# Altium PCB car2.PcbDoc
Units mm, origin at the board's own origin, x right, y up, seen from the top; angles counter-clockwise.
Board outline 99.57 x 90.42 mm, 2 copper layers (Top Layer, Bottom Layer); 59 components, 55 nets, 230 pads, 60 vias.
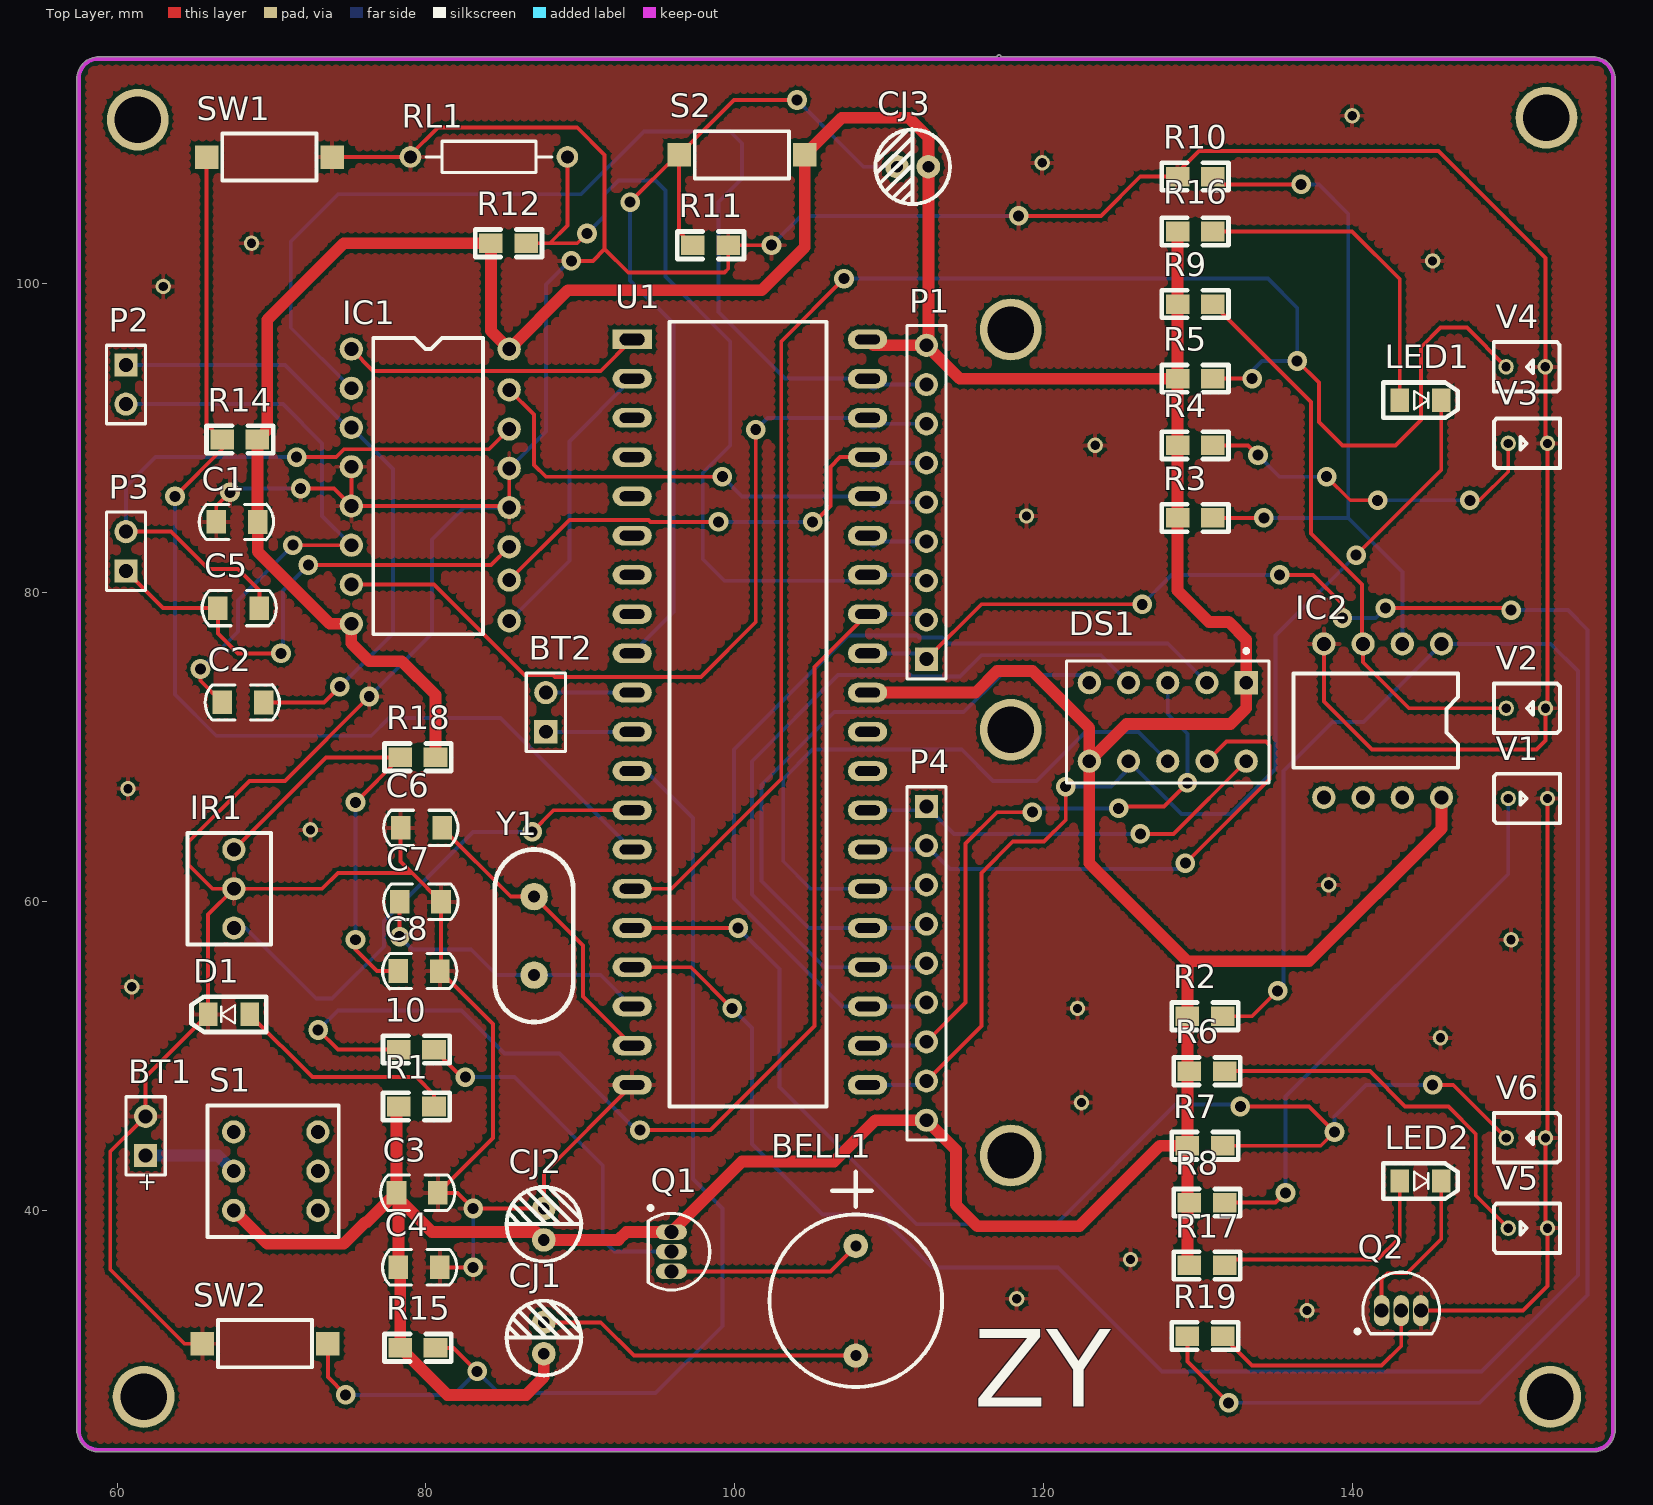
[diagram p0: Top Layer view]
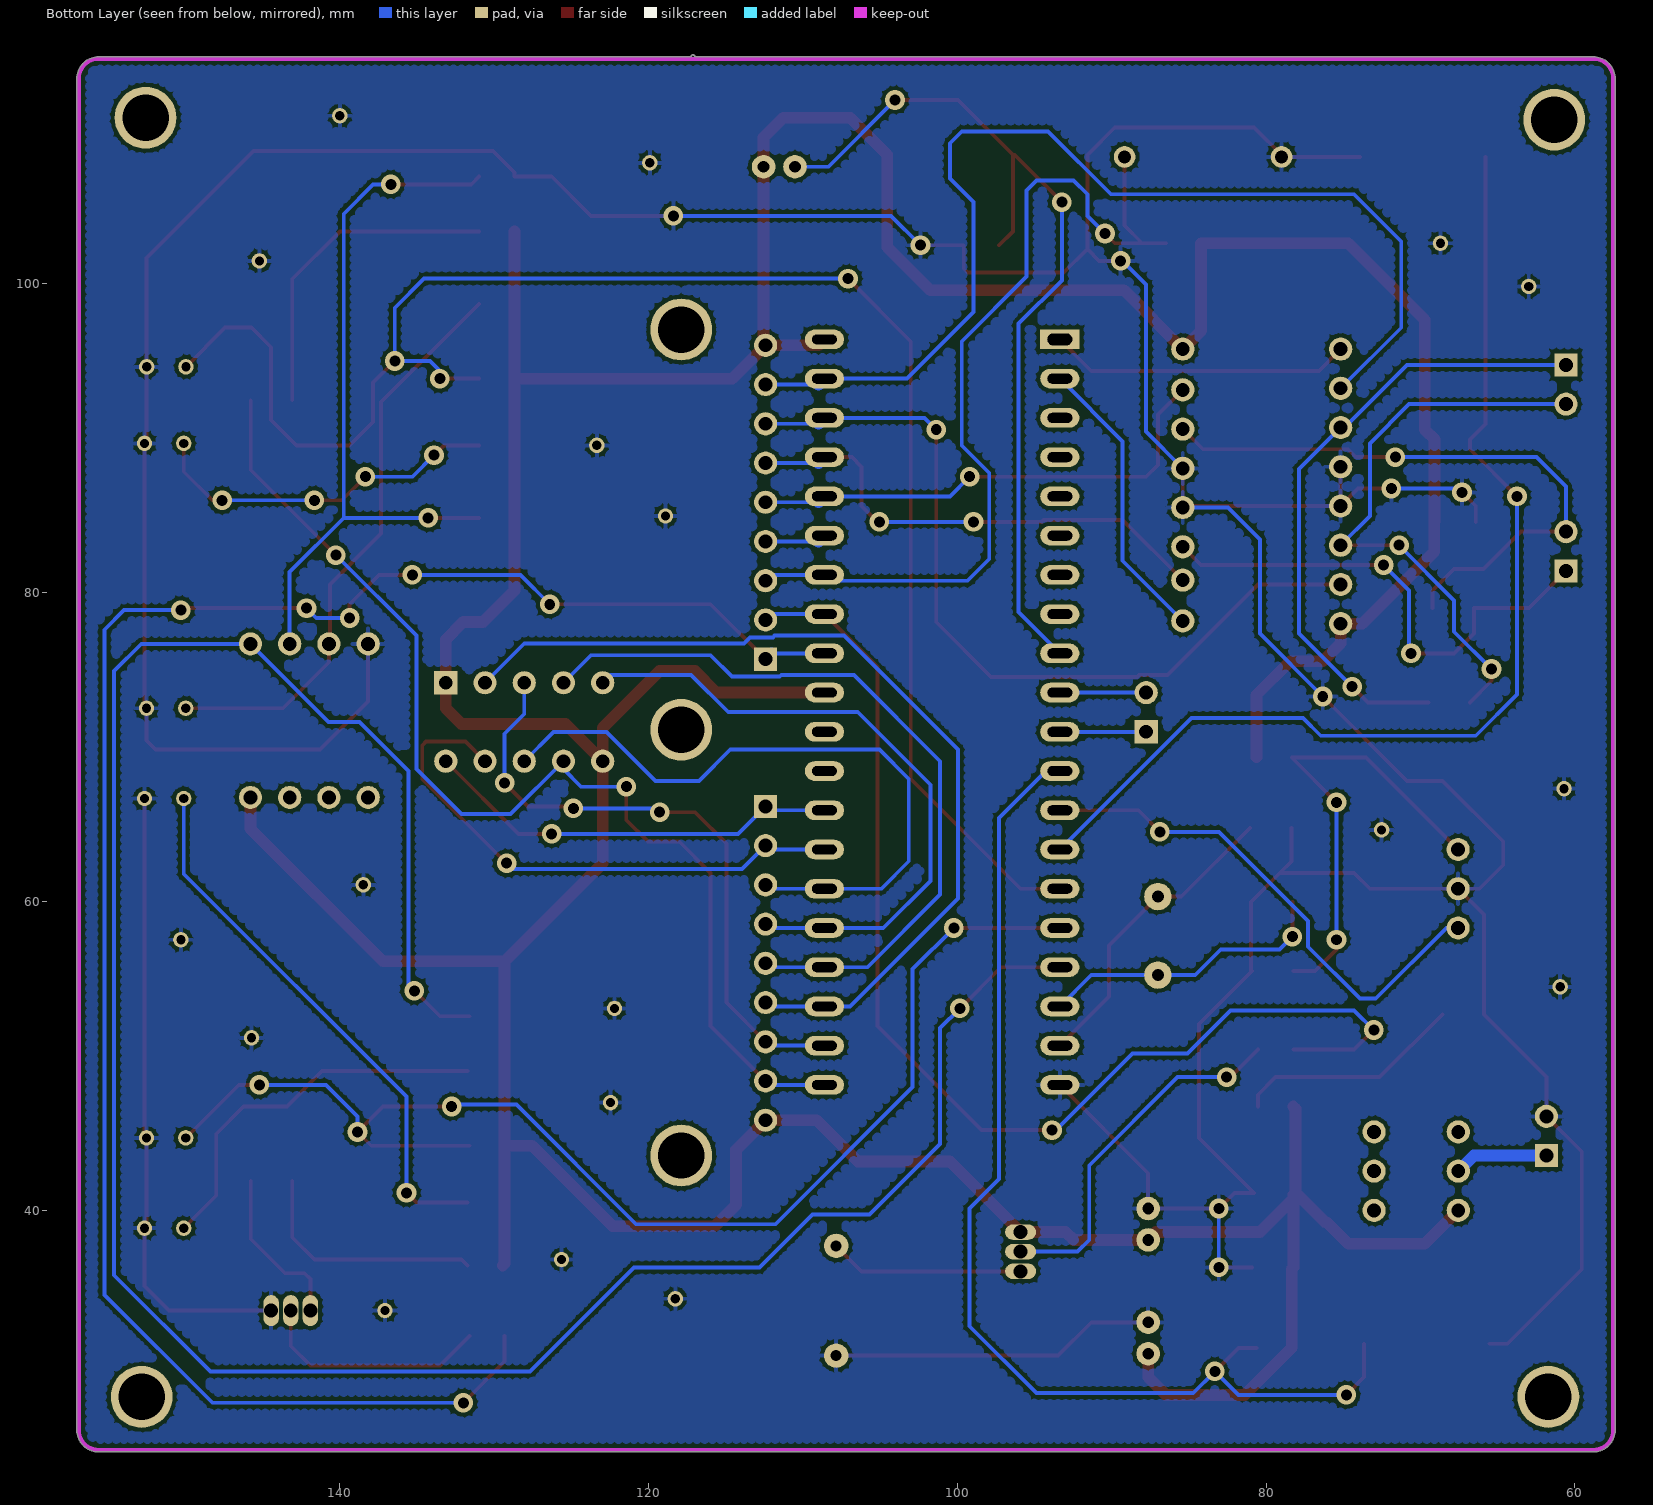
[diagram p1: Bottom Layer view, seen from below]

## Layer stack, top to bottom
Top Layer: signal copper 0.0356
Dielectric: dielectric 0.32, FR-4, Dk 4.8
Bottom Layer: signal copper 0.0356

## Board outline
57.404,25.781 ccw(c58.801,25.781) 58.801,24.384 155.575,24.384 ccw(c155.575,25.781) 156.972,25.781 156.972,113.284 ccw(c155.575,113.284) 155.575,114.681 117.221,114.681 ccw(c117.094,114.681) 116.967,114.681 58.801,114.681 ccw(c58.801,113.284) 57.404,113.284

## Design rules (kind name [scope] priority, off if disabled: settings)
Clearance [All] p1: gap=0.254
PolygonConnect [All] p1: connectstyle=Relief reliefconductorwidth=0.254 reliefentries=4 polygonreliefangle="90 Angle" airgapwidth=0.254
RoutingVias [All] p1: holewidth=0.711 width=1.27 viastyle="Through Hole" minholewidth=0.711 minwidth=1.27 maxholewidth=0.711 maxwidth=1.27
SolderMaskExpansion [All] p1: expansion=0.102
Width [InNet('VCC')] p1: maxlimit=0.762 minlimit=0.762 preferedwidth=0.762
Width Width_1 [All] p2: maxlimit=0.762 minlimit=0.254 preferedwidth=0.254 toplayer_maxwidth=0.254 minimp=50.000000 maximp=50.000000 favimp=50.000000
28 further rules are at their usual default settings.

## Components (designator, comment, footprint, x,y, rotation, side; value= is the part's Value field where it differs from the comment)
10 "Res2" 0805 80.518,50.419 r180 top (schematic designator R13)
BELL1 "BELL" BELL 107.823,37.719 r90 top
BT1 "Battery" BAT-2 61.849,44.831 r90 top
BT2 "Header 2" HDR1X2 87.757,70.993 r90 top
C1 "Cap" 0805C 66.421,84.582 r0 top
C2 "Cap" 0805C 66.802,72.898 r0 top
C3 "Cap" 0805C 80.772,41.148 r180 top
C4 "Cap" 0805C 80.899,36.322 r180 top
C5 "Cap" 0805C 69.215,78.994 r180 top
C6 "Cap" 0805C 78.359,64.777 r0 top
C7 "Cap" 0805C 80.974,59.983 r180 top
C8 "Cap" 0805C 80.899,55.499 r180 top
CJ1 "" RB10U 87.63,31.75 r90 top
CJ2 "" RB10U 87.63,39.116 r90 top
CJ3 "" RB10U 111.506,107.569 r180 top
D1 "LED0" 0805-LED 68.58,52.705 r0 top
DS1 "Dpy Amber-CA" A 128.016,71.628 r270 top
IC1 "L293D" L293D 80.137,87.249 r0 top
IC2 "LM393" LM393 141.478,71.712 r270 top
IR1 "红外1838" 红外1838 67.564,60.833 r90 top
LED1 "LED" 0805-LED 143.033,92.456 r180 top
LED2 "LED" 0805-LED 143.033,41.91 r180 top
P1 "Header 9" HDR1X9 112.395,75.692 r90 top
P2 "Header 2" HDR1X2 60.579,94.742 r270 top
P3 "Header 2" HDR1X2 60.579,81.407 r90 top
P4 "Header 9" HDR1X9 112.395,66.167 r270 top
Q1 "2N3906" TO-92A 95.885,37.338 r180 top
Q2 "2N3906" TO-92A 143.129,33.528 r270 top
R1 "Res2" 0805 78.232,46.736 r0 top
R2 "Res2" 0805 131.572,52.578 r180 top
R3 "Res2" 0805 130.937,84.836 r180 top
R4 "Res2" 0805 128.651,89.535 r0 top
R5 "Res2" 0805 128.651,93.853 r0 top
R6 "Res2" 0805 129.413,49.022 r0 top
R7 "Res2" 0805 129.286,44.196 r0 top
R8 "Res2" 0805 129.413,40.513 r0 top
R9 "Res2" 0805 128.651,98.679 r0 top
R10 "Res2" 0805 128.651,106.934 r0 top
R11 "Res2" 0805 99.568,102.489 r180 top
R12 "Res2" 0805 84.201,102.616 r0 top
R14 "Res2" 0805 69.088,89.916 r180 top
R15 "Res2" 0805 78.33,31.115 r0 top
R16 "Res2" 0805 128.651,103.378 r0 top
R17 "Res2" 0805 129.413,36.449 r0 top
R18 "Res2" 0805 78.33,69.342 r0 top
R19 "Res2" 0805 131.572,31.877 r180 top
RL1 "Res2" AXIAL-0.4 84.074,108.204 r0 top
S1 "自锁开关" 自锁开关 70.104,42.545 r0 top
S2 "" SWD 96.393,108.331 r0 top
SW1 "SW" SWD 73.914,108.204 r180 top
SW2 "SW" SWD 65.532,31.369 r0 top
U1 "AT89C51" 89c52 101.473,72.898 r0 top
V1 "红外管" 红外管 151.257,66.675 r0 top
V2 "红外管" 红外管 151.267,72.517 r180 top
V3 "红外管" 红外管 151.257,89.662 r0 top
V4 "红外管" 红外管 151.257,94.615 r180 top
V5 "红外管" 红外管 151.257,38.862 r0 top
V6 "红外管" 红外管 151.267,44.704 r180 top
Y1 "11.0592MHZ" XTAL 86.995,57.785 r90 top

## Footprints (in the part's own frame and the unit in brackets; to place one, negate y for a bottom-side part, rotate by r counter-clockwise, add the part's x,y. Pads: shape width x height; smd on the part's side, far side on the other; paste and mask are expansions set on the pad)
89c52 [mil]
  rect 100x50 hole 30 slot 62.99 at 0 deg: 1(-320,925)
  oval 100x50 hole 25 slot 62.99 at 0 deg: 2(-320,825) 3(-320,725) 4(-320,625) 5(-320,525) 6(-320,425) 7(-320,325) 8(-320,225) 9(-320,125) 10(-320,25) 11(-320,-75) 12(-320,-175) 13(-320,-275) 14(-320,-375) 15(-320,-475) 16(-320,-575) 17(-320,-675) 18(-320,-775) 19(-320,-875) 20(-320,-975) 21(280,-975) 22(280,-875) 23(280,-775) 24(280,-675) 25(280,-575) 26(280,-475) 27(280,-375) 28(280,-275) 29(280,-175) 30(280,-75) 31(280,25) 32(280,125) 33(280,225) 34(280,325) 35(280,425) 36(280,525) 37(280,625) 38(280,725) 39(280,825) 40(280,925)
  silkscreen extent -225,-1030 175,970
0805 [mil]
  rect 60x50 smd: 1(0,0) 2(90,0)
  silkscreen extent -40,-35 130,35
0805-LED [mm]
  rect 1.2x1.5 smd: 1(0,0) 2(-2.686,0)
  silkscreen extent -3.76,-1.14 1.07,1.14
0805C [mil]
  rect 50x60 smd: 1(0,0) 2(105.71,-0.32)
  silkscreen extent -43,-45 146,45
A [mm] "LED, 7-Segment Display, 7.62 mm, RHD; 10 Leads; Row Space 5.08 mm; Pitch 2.54 mm"
  rect 1.5x1.5 hole 0.9: 1(-2.54,5.08)
  round 1.5 hole 0.9: 2(-2.54,2.54) 3(-2.54,0) 4(-2.54,-2.54) 5(-2.54,-5.08) 6(2.54,-5.08) 7(2.54,-2.54) 8(2.54,0) 9(2.54,2.54) 10(2.54,5.08)
  silkscreen extent -4.72,-6.55 3.95,6.55, body extent -3.95,-6.55 3.95,6.55, height 6.34
AXIAL-0.4 [mm] "Axial Device, Thru-Hole; 2 Leads; 0.4 in Pin Spacing"
  round 1.4 hole 0.85: 1(-5.08,0) 2(5.08,0)
  silkscreen extent -4.06,-1.02 4.06,1.02
BAT-2 [mm] "Battery; 2 Leads"
  rect 1.5x1.5 hole 0.9: 1(-1.27,0)
  round 1.5 hole 0.9: 2(1.27,0)
  silkscreen extent -2.54,-1.27 2.54,1.27
BELL [mil]
  round 62 hole 28: 1(0,0) 2(-280,0)
  silkscreen extent -360,-220 188,220
HDR1X2 [mm] "Connector; Header; 2 Position"
  rect 1.5x1.5 hole 0.9: 1(0,0)
  round 1.5 hole 0.9: 2(2.54,0)
  silkscreen extent -1.27,-1.27 3.81,1.27
HDR1X9 [mm] "Connector; Header; 9 Position"
  rect 1.5x1.5 hole 0.9: 1(0,0)
  round 1.5 hole 0.9: 2(2.54,0) 3(5.08,0) 4(7.62,0) 5(10.16,0) 6(12.7,0) 7(15.24,0) 8(17.78,0) 9(20.32,0)
  silkscreen extent -1.27,-1.27 21.59,1.27
L293D [mm]
  round 1.5 hole 0.9: 1(-4.97,8.52) 2(-4.97,5.98) 3(-4.97,3.44) 4(-4.97,0.9) 5(-4.97,-1.64) 6(-4.97,-4.18) 7(-4.97,-6.72) 8(-4.97,-9.26) 9(5.25,-9.08) 10(5.25,-6.44) 11(5.25,-4.28) 12(5.25,-1.74) 13(5.25,0.8) 14(5.25,3.34) 15(5.25,5.88) 16(5.25,8.52)
  silkscreen extent -3.55,-9.94 3.55,9.23
LM393 [mm]
  round 1.5 hole 0.9: 1(-4.97,4.26) 2(-4.97,1.72) 3(-4.97,-0.82) 4(-4.97,-3.36) 5(4.97,-3.36) 6(4.97,-0.82) 7(4.97,1.72) 8(4.97,4.26)
  silkscreen extent -3.05,-5.33 3.05,5.33
RB10U [mil]
  round 60 hole 30: 1(-40,0) 2(40,0)
  silkscreen extent -95,-96 95,95
SWD [mil]
  rect 60x60 smd: 1(-0.4,0.5) 2(319.6,0.5)
  silkscreen extent 40,-60 280,61
TO-92A [mm] "TO, Flat Index; 3 In-Line, Axial Leads; Body Dia. 4.5mm; Leads 0.51 x 0.48 mm (max)"
  oval 2x1 hole 0.9: 1(0,-1.27) 2(0,0) 3(0,1.27)
  silkscreen extent -2.48,-2.95 1.5,2.48, body extent -2.5,-2.5 1.5,2.5, height 6.86
XTAL [mil]
  round 70 hole 30: 1(-100,0) 2(100,0)
  silkscreen extent -220,-100 220,100
红外1838 [mm]
  round 1.5 hole 0.9: 1(-2.54,0) 2(0,0) 3(2.54,0)
  silkscreen extent -3.6,-2.4 3.6,3
红外管 [mm]
  round 1 hole 0.6: 1(-1.2,0) 2(1.34,0)
  silkscreen extent -2.13,-1.6 2.14,1.6
自锁开关 [mm]
  round 1.5 hole 0.9: 1(-2.55,2.55) 2(2.9,2.55) 3(-2.55,0.01) 4(2.9,0.01) 5(-2.55,-2.53) 6(2.9,-2.53)
  silkscreen extent -4.25,-4.25 4.25,4.25

## Part data
10 R1 R2 R3 R4 R5 R6 R7 R8 R9 R10 R11 R12 R14 R15 R16 R17 R18 R19 RL1: "Resistor"
BT1: "Multicell Battery"
BT2 P2 P3: "Header, 2-Pin"
C1 C2 C3 C4 C5 C6 C7 C8: "Capacitor"
CJ1 CJ2 CJ3: library part "Cap Pol1", "Polarized Capacitor (Radial)"
D1: "Typical INFRARED GaAs LED"
DS1: "7.62 mm Black Surface Orange 7-Segment Display: CA, RH DP"
P1 P4: "Header, 9-Pin"
Q1 Q2: "PNP General Purpose Amplifier"
S2: library part SW-PB, "Switch"
V1 V2 V3 V4 V5 V6: library part LED
Y1: library part XTAL, "Crystal Oscillator"

## Free pads (board coordinates)
  round 4 hole 3: D(61.341,110.617) D(61.722,27.94) D(117.856,43.561) D(117.856,71.12) D(117.856,97.028) D(152.527,110.744) D(152.781,27.94)
  round 1 hole 0.6: GND(60.706,67.31) GND(60.96,54.483) GND(62.992,99.822) GND(68.707,102.616) GND(72.517,64.643) GND(118.237,34.29) GND(118.872,84.963) GND(119.888,107.823) GND(122.174,53.086) GND(122.428,46.99) GND(123.317,89.535) GND(125.603,36.83) GND(137.033,33.528) GND(138.43,61.087) GND(139.954,110.871) GND(145.161,101.473) GND(145.669,51.181) GND(150.241,57.531)

## Via types
v1: diameter 1.27, hole 0.711, Top Layer to Bottom Layer, 60 vias

## Nets (pads, with @x,y where several pads share a name; then routed paths per layer and width w, separated by ;. In a path a pad name is that pad's centre, name@x,y a point inside that pad or via, vN(x,y) a via of type N, cw(c..) or ccw(c..) an arc to the next point about the centre after c; other vN are vias at no path point)
GND: BELL1.2 BT1.2 C1.1 C3.1 C4.1 C6.1 C7.1 C8.1 CJ1.2 CJ2.2 D1.2 IC1.4 IC1.5 IC1.12 IC1.13 IC2.4 IR1.2 pad.GND Q2.3 R10.1 R11.1 RL1.1 SW1.1 SW2.1 U1.20 V1.2 V2.1 V3.2 V4.1 V5.2 V6.1 | length 387.7
  Top Layer w0.254: SW2.1 64.376,31.382 59.563,36.195 59.563,43.815 BT1.2 61.849,48.66 D1.2 65.894,59.163 IR1.2 ; C1.1 66.421,85.598 v1(67.31,86.487) ; v1(71.882,86.741) 74.035,86.741 IC1.5 ; SW1.1 78.981,108.191 78.981,108.318 80.772,110.109 89.789,110.109 91.567,108.331 91.567,102.235 ; IC1.4 IC1.5 ; v1(76.327,73.279) 70.866,67.818 68.58,67.818 64.643,63.881 64.643,62.357 66.167,60.833 IR1.2 ; C6.1 78.359,62.598 79.108,61.849 ; C4.1 v1(83.058,36.322) ; IC1.13 IC1.12 85.287,85.609 IC1.5 ; CJ1.2 91.313,32.766 93.472,30.607 BELL1.2 ; v1(89.408,101.473) 90.805,101.473 91.567,102.235 ; U1.20 87.63,42.418 CJ2.2 v1(83.058,40.132) 82.042,41.148 C3.1 84.328,44.704 84.328,52.07 C8.1 80.974,55.574 C7.1 79.108,61.849 ; v1(102.362,102.489) R11.1 99.568,100.965 99.314,100.711 93.091,100.711 91.567,102.235 ; v1(118.364,104.394) 123.698,104.394 126.238,106.934 R10.1 128.651,107.188 130.048,108.585 145.542,108.585 152.457,101.67 V4.1 152.457,89.802 V3.2 V2.1@152.597,72.517 ; IC2.4 138.118,72.956 141.224,69.85 151.892,69.85 152.467,70.425 V2.1 ; Q2.3 151.003,33.528 152.597,35.122 V5.2 152.467,38.992 V6.1 152.597,44.834 V1.2 ; IR1.2 73.279,60.833 74.295,61.849 79.108,61.849
  Bottom Layer w0.254: v1(67.31,86.487) 67.564,86.741 v1(71.882,86.741) ; v1(76.327,73.279) 80.391,77.343 80.391,83.439 82.461,85.509 IC1.12 ; v1(83.058,36.322) v1(83.058,40.132) ; IC1.13 87.757,90.419 87.757,99.949 89.281,101.473 v1(89.408,101.473) ; v1(102.362,102.489) 104.267,104.394 v1(118.364,104.394)
NetBELL1_1: BELL1.1 Q1.3 | length 12.6
  Top Layer w0.254: Q1.3 106.172,36.068 BELL1.1
NetBT1_1: BT1.1 S1.3 | length 6.1
  Bottom Layer w0.762: BT1.1 66.548,43.561 S1.3
NetC2_1: C2.1 IC1.6 P2.2 | length 38.1
  Top Layer w0.254: v1(65.405,75.057) 65.405,74.295 C2.1 ; v1(71.385,83.069) IC1.6
  Bottom Layer w0.254: P2.2 70.739,92.202 73.279,89.662 73.279,84.957 IC1.6 ; v1(65.405,75.057) 67.818,77.47 67.818,79.502 v1(71.385,83.069)
NetC2_2: C2.2 IC1.3 P2.1 | length 40.9
  Top Layer w0.254: C2.2 73.398,72.89 v1(74.422,73.914)
  Bottom Layer w0.254: P2.1 70.866,94.742 74.919,90.689 IC1.3 77.851,88.005 77.851,77.343 v1(74.422,73.914)
NetC5_1: C5.1 IC1.14 P3.2 | length 40.6
  Top Layer w0.254: P3.2 63.5,83.947 65.913,81.534 67.818,81.534 69.215,80.137 C5.1 ; v1(71.628,88.773) 74.192,88.773 74.699,89.28 84.078,89.28 IC1.14
  Bottom Layer w0.254: P3.2 60.579,86.868 62.484,88.773 v1(71.628,88.773)
NetC5_2: C5.2 IC1.11 P3.1 | length 33.1
  Top Layer w0.254: P3.1 62.984,79.002 C5.2 66.53,77.361 67.818,76.073 v1(70.612,76.073) ; v1(72.39,81.788) 74.108,81.788 ; 74.119,81.799 84.217,81.799 IC1.11
  Bottom Layer w0.254: v1(70.612,76.073) 70.739,76.2 70.739,80.137 v1(72.39,81.788)
NetC8_2: C8.2 IR1.3 R18.1 | length 30.2
  Top Layer w0.254: IR1.3 73.533,69.342 R18.1 78.33,69.313 v1(75.438,66.421) ; v1(75.438,57.531) 75.438,56.896 76.827,55.507 C8.2
  Bottom Layer w0.254: v1(75.438,57.531) v1(75.438,66.421)
NetD1_1: D1.1 R1.2 | length 14.9
  Top Layer w0.254: D1.1 72.644,48.641 79.375,48.641 80.518,47.498 R1.2
NetIC2_2: IC2.2 R3.1 R10.2 | length 47.8
  Top Layer w0.254: R3.1 v1(134.239,84.836) ; R10.2 131.445,106.426 v1(136.652,106.426)
  Bottom Layer w0.254: v1(134.239,84.836) 139.7,84.836 ; v1(136.652,106.426) 137.795,106.426 139.7,104.521 139.7,84.836 ; IC2.2 143.198,81.338 139.7,84.836
NetIC2_3: IC2.3 R9.2 V2.2 | length 37.6
  Top Layer w0.254: R9.2 137.287,92.329 137.287,83.82 140.589,80.518 IC2.3@140.589,76.751 ; IC2.3 140.658,75.496 143.637,72.517 V2.2
NetLED1_1: LED1.1 R16.2 | length 21.2
  Top Layer w0.254: R16.2 139.954,103.378 143.033,100.299 LED1.1
NetLED2_1: LED2.1 R17.2 | length 15.7
  Top Layer w0.254: R17.2 132.08,36.83 141.605,36.83 143.033,38.258 LED2.1
NetLED2_2: LED2.2 Q2.1 | length 10.7
  Top Layer w0.254: Q2.1 141.859,35.56 142.24,35.941 143.51,35.941 145.719,38.15 LED2.2
NetQ1_2: 10.1 Q1.2 | length 23.6
  Top Layer w0.254: 10.1 82.296,48.641 v1(82.55,48.641)
  Bottom Layer w0.254: v1(82.55,48.641) 85.725,48.641 91.44,42.926 91.44,38.1 92.202,37.338 Q1.2
NetQ2_2: Q2.2 R19.1 | length 15.2
  Top Layer w0.254: R19.1 133.477,29.972 141.859,29.972 143.129,31.242 Q2.2
NetR4_2: R4.2 V3.1 | length 23.2
  Top Layer w0.254: R4.2 133.223,89.535 v1(133.858,88.9) ; v1(138.303,87.503) 139.827,85.979 v1(141.605,85.979) ; v1(147.574,85.979) 148.209,85.979 150.057,87.827 V3.1
  Bottom Layer w0.254: v1(133.858,88.9) 135.255,87.503 v1(138.303,87.503) ; v1(141.605,85.979) v1(147.574,85.979)
NetR6_2: R6.2 V5.1 | length 24.9
  Top Layer w0.254: R6.2 141.097,49.022 143.383,46.736 146.177,46.736 147.955,44.958 147.955,40.964 V5.1
NetR8_2: R8.2 V1.1 | length 35.7
  Top Layer w0.254: R8.2 135.001,40.513 v1(135.636,41.148)
  Bottom Layer w0.254: v1(135.636,41.148) 135.636,47.371 150.057,61.792 V1.1
P0.0: IC1.2 P1.8 U1.39 | length 70.6
  Bottom Layer w0.254: IC1.2 71.247,97.149 71.247,102.743 74.295,105.791 90.043,105.791 94.107,109.855 99.695,109.855 100.457,109.093 100.457,106.807 98.933,105.283 98.933,98.171 103.251,93.853 U1.39 ; U1.39@108.966,93.472 P1.8
  Bottom Layer w0.762: U1.39 U1.39@108.966,93.472
P0.1: IC1.7 P1.7 U1.38 | length 54.1
  Top Layer w0.254: IC1.7 80.507,80.529 86.372,74.664 88.225,74.664 88.34,74.549 97.79,74.549 101.346,78.105 v1(101.346,90.551)
  Bottom Layer w0.254: v1(101.346,90.551) 102.108,91.313 U1.38 ; U1.38@108.966,90.932 P1.7
  Bottom Layer w0.762: U1.38 U1.38@108.966,90.932
P0.2: IC1.10 P1.6 U1.37 | length 32.2
  Top Layer w0.254: IC1.10 89.287,84.709 94.401,84.709 94.528,84.582 v1(98.933,84.582) ; v1(105.029,84.582) 105.029,84.455 106.172,85.598 106.172,88.138 106.807,88.773 U1.37
  Bottom Layer w0.254: v1(98.933,84.582) v1(105.029,84.582) ; U1.37@108.966,88.392 P1.6
  Bottom Layer w0.762: U1.37 U1.37@108.966,88.392
P0.3: IC1.15 P1.5 U1.36 | length 31.9
  Top Layer w0.254: IC1.15 86.995,91.521 86.995,88.265 87.757,87.503 v1(99.187,87.503)
  Bottom Layer w0.254: v1(99.187,87.503) 100.457,86.233 U1.36 ; U1.36@108.966,85.852 P1.5
  Bottom Layer w0.762: U1.36 U1.36@108.966,85.852
P0.4: P1.4 U1.35 | length 4
  Bottom Layer w0.254: U1.35@108.966,83.312 P1.4
  Bottom Layer w0.762: U1.35 U1.35@108.966,83.312
P0.5: P1.3 R12.2 RL1.2 U1.34 | length 59.6
  Top Layer w0.254: R12.2 88.011,102.616 ; RL1.2 89.154,103.759 88.011,102.616 ; v1(90.424,103.251) 89.789,102.616 88.011,102.616
  Bottom Layer w0.254: v1(90.424,103.251) 91.567,104.394 91.567,105.791 92.456,106.68 94.869,106.68 95.504,106.045 95.504,100.457 99.695,96.266 99.695,89.535 97.917,87.757 97.917,82.169 99.314,80.772 108.204,80.772 U1.34 112.014,81.153 P1.3
P0.6: 10.2 P1.2 U1.33 | length 76.4
  Top Layer w0.254: v1(73.025,51.689) 74.295,50.419 10.2 ; v1(93.853,45.212) 98.425,45.212 105.156,51.943 105.156,75.184 U1.33
  Bottom Layer w0.254: v1(73.025,51.689) 74.295,52.959 82.296,52.959 85.09,50.165 88.646,50.165 v1@93.599,45.212 ; U1.33 112.014,78.613 P1.2
  Bottom Layer w0.762: v1@93.599,45.212 v1(93.853,45.212)
P0.7: P1.1 R19.2 U1.32 | length 126.2
  Top Layer w0.254: P1.1 115.951,79.248 v1(126.365,79.248) ; R19.2 129.286,30.226 v1(131.953,27.559) ; v1(135.255,81.153) 137.414,81.153 139.319,79.248 v1(139.319,78.359) ; v1(142.113,78.994) 150.114,78.994 v1(150.241,78.867)
  Bottom Layer w0.254: U1.32 P1.1@112.014,76.073 ; v1(126.365,79.248) 128.27,81.153 v1(135.255,81.153) ; v1(131.953,27.559) 148.209,27.559 155.194,34.544 155.194,77.597 153.924,78.867 v1(150.241,78.867) ; v1(139.319,78.359) 141.478,78.359 v1(142.113,78.994)
  Bottom Layer w0.762: P1.1@112.014,76.073 P1.1
P1.0: IC1.1 U1.1 | length 19.6
  Top Layer w0.254: IC1.1 76.575,94.361 91.313,94.361 U1.1
P1.1: IC1.9 U1.2 | length 19
  Bottom Layer w0.254: IC1.9 89.281,82.063 89.281,89.789 U1.2
P1.2: U1.3
P1.3: U1.4
P1.4: U1.5
P1.5: U1.6
P1.6: U1.7
P1.7: U1.8
P2.0: DS1.7 LED1.2 P4.8 U1.21 | length 73
  Top Layer w0.254: P4.8 115.951,51.943 115.951,61.849 117.983,63.881 120.015,63.881 121.412,65.278 v1(121.412,67.437) ; v1(140.208,82.423) 145.719,87.934 LED1.2
  Bottom Layer w0.254: U1.21 P4.8@112.141,48.133 ; v1(121.412,67.437) 124.333,67.437 125.476,68.58 DS1.7 128.905,65.659 132.08,65.659 135.001,68.58 135.001,77.216 v1(140.208,82.423)
P2.1: DS1.3 P4.7 U1.22 | length 40.4
  Top Layer w0.254: P4.7 114.935,53.467 114.935,63.754 116.967,65.786 v1(119.253,65.786) ; v1(124.841,66.04) 124.968,66.167 127.762,66.167 v1(129.286,67.691)
  Bottom Layer w0.254: U1.22 P4.7@112.141,50.673 ; v1(119.253,65.786) 119.507,66.04 v1(124.841,66.04) ; DS1.3 128.016,72.136 129.286,70.866 v1(129.286,67.691)
P2.2: DS1.2 P4.6 U1.23 | length 59.7
  Bottom Layer w0.254: P4.6@112.141,53.213 U1.23 106.934,53.213 99.949,60.198 99.949,69.85 107.315,77.216 111.812,77.216 111.927,77.101 113.399,77.101 113.792,76.708 128.016,76.708 DS1.2
P2.3: DS1.4 P4.5 U1.24 | length 49.7
  Bottom Layer w0.254: P4.5@112.141,55.753 U1.24 105.791,55.753 101.092,60.452 101.092,69.088 106.68,74.676 111.372,74.676 111.487,74.561 114.566,74.561 115.951,75.946 123.698,75.946 DS1.4
P2.4: DS1.5 P4.4 U1.25 | length 42.3
  Bottom Layer w0.254: P4.4@112.141,58.293 U1.25 104.775,58.293 101.727,61.341 101.727,67.564 106.426,72.263 114.808,72.263 117.221,74.676 122.428,74.676 DS1.5
P2.5: DS1.8 P4.3 U1.26 | length 43.7
  Bottom Layer w0.254: P4.3@112.141,60.833 U1.26 104.902,60.833 103.124,62.611 103.124,67.945 105.029,69.85 114.681,69.85 116.713,67.818 119.507,67.818 122.682,70.993 126.111,70.993 DS1.8
P2.6: DS1.9 P4.2 U1.27 | length 36
  Top Layer w0.254: v1(129.159,62.484) 134.62,67.945 134.62,70.104 134.366,70.358 131.826,70.358 DS1.9
  Bottom Layer w0.254: U1.27 P4.2@112.141,63.373 ; P4.2 113.919,62.103 128.778,62.103 v1(129.159,62.484)
  Bottom Layer w0.762: P4.2@112.141,63.373 P4.2
P2.7: DS1.10 P4.1 U1.28 | length 27.3
  Top Layer w0.254: v1(126.238,64.389) 128.397,64.389 DS1.10
  Bottom Layer w0.254: U1.28 P4.1@112.141,65.913 ; P4.1 114.173,64.389 v1(126.238,64.389)
  Bottom Layer w0.762: P4.1@112.141,65.913 P4.1
P3.0/RXD: BT2.2 U1.10 | length 5.6
  Bottom Layer w0.254: BT2.2 U1.10
P3.1/TXD: BT2.1 U1.11 | length 5.6
  Bottom Layer w0.254: BT2.1 U1.11
P3.2: R15.2 SW2.2 U1.12 | length 73.4
  Top Layer w0.254: SW2.2 73.65,29.22 v1(74.803,28.067) ; R15.2 81.788,31.115 v1(83.312,29.591)
  Bottom Layer w0.254: v1(74.803,28.067) 81.788,28.067 v1(83.312,29.591) 84.709,28.194 94.869,28.194 99.187,32.512 99.187,40.132 97.282,42.037 97.282,65.405 94.234,68.453 U1.12
P3.3: IR1.1 U1.13 | length 33.7
  Top Layer w0.254: v1(86.868,64.516) 88.265,65.913 U1.13
  Bottom Layer w0.254: IR1.1 68.326,58.293 72.898,53.721 73.914,53.721 77.273,57.08 77.273,58.744 83.045,64.516 v1(86.868,64.516)
P3.4: R14.2 SW1.2 U1.14 | length 71.2
  Top Layer w0.254: v1(63.754,86.233) 66.802,89.281 R14.2 65.796,90.922 SW1.2
  Bottom Layer w0.254: v1(63.754,86.233) 63.754,73.406 66.421,70.739 76.454,70.739 77.597,71.882 84.829,71.882 93.338,63.373 U1.14
P3.5: R5.2 U1.15 V4.2 | length 110.7
  Top Layer w0.254: U1.15 95.885,60.833 102.997,67.945 102.997,96.266 v1(107.061,100.33) ; R5.2 v1(133.477,93.853) ; v1(136.398,94.996) 137.795,93.599 137.795,91.059 139.319,89.535 142.748,89.535 144.399,91.186 144.399,95.885 145.669,97.155 147.377,97.155 V4.2
  Bottom Layer w0.254: v1(107.061,100.33) 134.493,100.33 136.398,98.425 v1(136.398,94.996) 134.112,94.996 133.477,94.361 v1(133.477,93.853)
P3.6: R7.2 U1.16 V6.2 | length 83.8
  Top Layer w0.254: U1.16 v1(100.203,58.293) ; R7.2 137.922,44.196 v1(138.811,45.085) 137.16,46.736 v1(132.715,46.736) ; v1(145.161,48.133) 146.498,48.133 V6.2
  Bottom Layer w0.254: v1(100.203,58.293) 102.87,55.626 102.87,48.006 111.76,39.116 120.777,39.116 128.524,46.863 132.588,46.863 v1(132.715,46.736) ; v1(138.811,45.085) 138.811,46.101 140.843,48.133 v1(145.161,48.133)
P3.7: IC2.1 R2.1 U1.17 | length 159.9
  Top Layer w0.254: U1.17 97.155,55.753 v1(99.822,53.086) ; R2.1 133.477,52.578 v1(135.128,54.229)
  Bottom Layer w0.254: v1(99.822,53.086) 101.092,51.816 101.092,44.323 105.664,39.751 109.347,39.751 112.776,36.322 120.904,36.322 127.635,29.591 148.336,29.591 154.559,35.814 154.559,74.93 152.807,76.682 IC2.1 140.684,71.628 138.684,71.628 135.509,68.453 135.509,54.61 v1(135.128,54.229)
RST: CJ3.2 R11.2 S2.1 U1.9 | length 59.4
  Top Layer w0.254: v1(93.218,105.283) S2.1@96.279,108.344 ; R11.2 96.383,103.388 S2.1 99.926,111.887 v1(104.013,111.887)
  Bottom Layer w0.254: v1(93.218,105.283) 93.218,100.203 96.012,97.409 96.012,78.74 U1.9 ; v1(104.013,111.887) 108.331,107.569 CJ3.2
VCC: C1.2 C3.2 C4.2 CJ1.1 CJ2.1 CJ3.1 DS1.1 DS1.6 IC1.8 IC1.16 IC2.8 P1.9 P4.9 Q1.1 R1.1 R2.2 R3.2 R4.1 R5.1 R6.1 R7.1 R8.1 R9.1 R12.1 R14.1 R15.1 R16.1 R17.1 R18.2 S1.5 S2.2 U1.31 U1.40 | length 355.8
  Top Layer w0.762: S1.5 69.723,37.846 74.676,37.846 76.073,39.243 ; 76.174,39.243 C3.2 ; R1.1 78.087,46.591 C3.2 ; R18.2 80.616,73.377 78.428,75.565 76.327,75.565 75.167,76.725 IC1.8 73.776,77.989 69.106,82.659 C1.2 69.088,84.592 R14.1 69.723,90.551 69.723,97.663 74.676,102.616 R12.1 84.201,96.955 IC1.16 89.186,99.568 101.727,99.568 104.511,102.352 S2.2 106.911,110.744 111.252,110.744 112.522,109.474 CJ3.1 112.522,96.139 P1.9 ; CJ1.1 87.63,29.21 86.487,28.067 81.369,28.067 78.33,31.106 R15.1 78.33,36.214 C4.2 C3.2@78.214,40.785 ; U1.31 115.57,73.533 116.967,74.93 119.253,74.93 122.936,71.247 DS1.6 ; U1.40 108.966,96.012 P1.9 ; R16.1 R9.1 R5.1 ; R17.1 129.286,36.576 R7.1 ; IC2.8 145.738,64.712 137.16,56.134 129.286,56.134 ; C3.2 78.214,41.029 C3.2@78.214,40.785 ; C3.2@78.214,40.785 80.391,38.608 87.122,38.608 CJ2.1 92.456,38.1 92.964,38.608 Q1.1 100.457,43.18 106.426,43.18 109.093,45.847 P4.9 114.3,43.942 114.3,40.386 115.697,38.989 122.301,38.989 127.508,44.196 R7.1 ; P1.9 114.554,93.853 R5.1 ; DS1.6 122.936,62.484 129.286,56.134 ; DS1.6 125.349,71.501 132.08,71.501 133.096,72.517 DS1.1 133.096,76.962 131.953,78.105 130.683,78.105 128.651,80.137 R3.2 R4.1 R5.1 ; R7.1 R2.2 129.286,56.134
XTAL1: C6.2 U1.19 Y1.2 | length 20.1
  Top Layer w0.254: C6.2 85.488,60.325 Y1.2 90.17,57.15 90.17,53.848 U1.19
XTAL2: C7.2 U1.18 Y1.1 | length 19.2
  Top Layer w0.254: v1(78.289,57.728) C7.2
  Bottom Layer w0.254: v1(78.289,57.728) 79.121,56.896 82.931,56.896 84.582,55.245 Y1.1 91.313,55.245 U1.18
pads on no net: IC2.5 IC2.6 IC2.7 S1.1 S1.2 S1.4 S1.6 U1.29 U1.30

## Polygon pours and split planes (outlines as drawn)
GND on Bottom Layer "Bottom Layer-No Net" (hatched 90Degree grid 0.508 track 0.6, remove dead copper, pour order 7): 51.435,118.364 51.816,117.983 163.957,117.983 163.957,18.161 162.56,16.764 158.877,20.447 49.149,20.447
GND on Top Layer "Bottom Layer-No Net" (hatched 90Degree grid 0.508 track 0.6, remove dead copper, pour order 5): 52.451,116.967 163.703,116.967 165.608,115.062 161.798,111.252 161.798,23.749 53.848,23.749 49.784,19.685

## Keep-outs
Keep-Out Layer:
  lines w0.254: 57.531,109.22 57.531,111.379 57.531,113.284 cw(c58.801,113.284) 58.801,114.554 59.436,114.554 61.468,114.554 154.686,114.554 155.575,114.554 cw(c155.575,113.284) 156.845,113.284 156.845,112.141 ; 57.531,110.617 57.531,25.781 ccw(c58.801,25.781) 58.801,24.511 59.055,24.511 155.575,24.511 ccw(c155.575,25.781) 156.845,25.781 156.845,27.178 156.845,112.395

## Silkscreen, mask and mechanical layers (free items; w line width, h text height)
Top Overlay:
  text "ZY" at 115.443,27.305 h5

## Text inside footprints (layer, text, board x,y; h text height)
BT1: Top Overlay "+" at 62.426,41.161 h1.15 r90